# Altium PCB PCB_BRD2.PcbDoc
Units mil, origin at the board's own origin, x right, y up, seen from the top; angles counter-clockwise.
Board outline 3500 x 2505 mil, 2 copper layers (Top Layer, Bottom Layer), stack 61.756 mil thick; 52 components, 33 nets, 161 pads, 0 vias.
Unrouted connection lines stored in the file: 127.
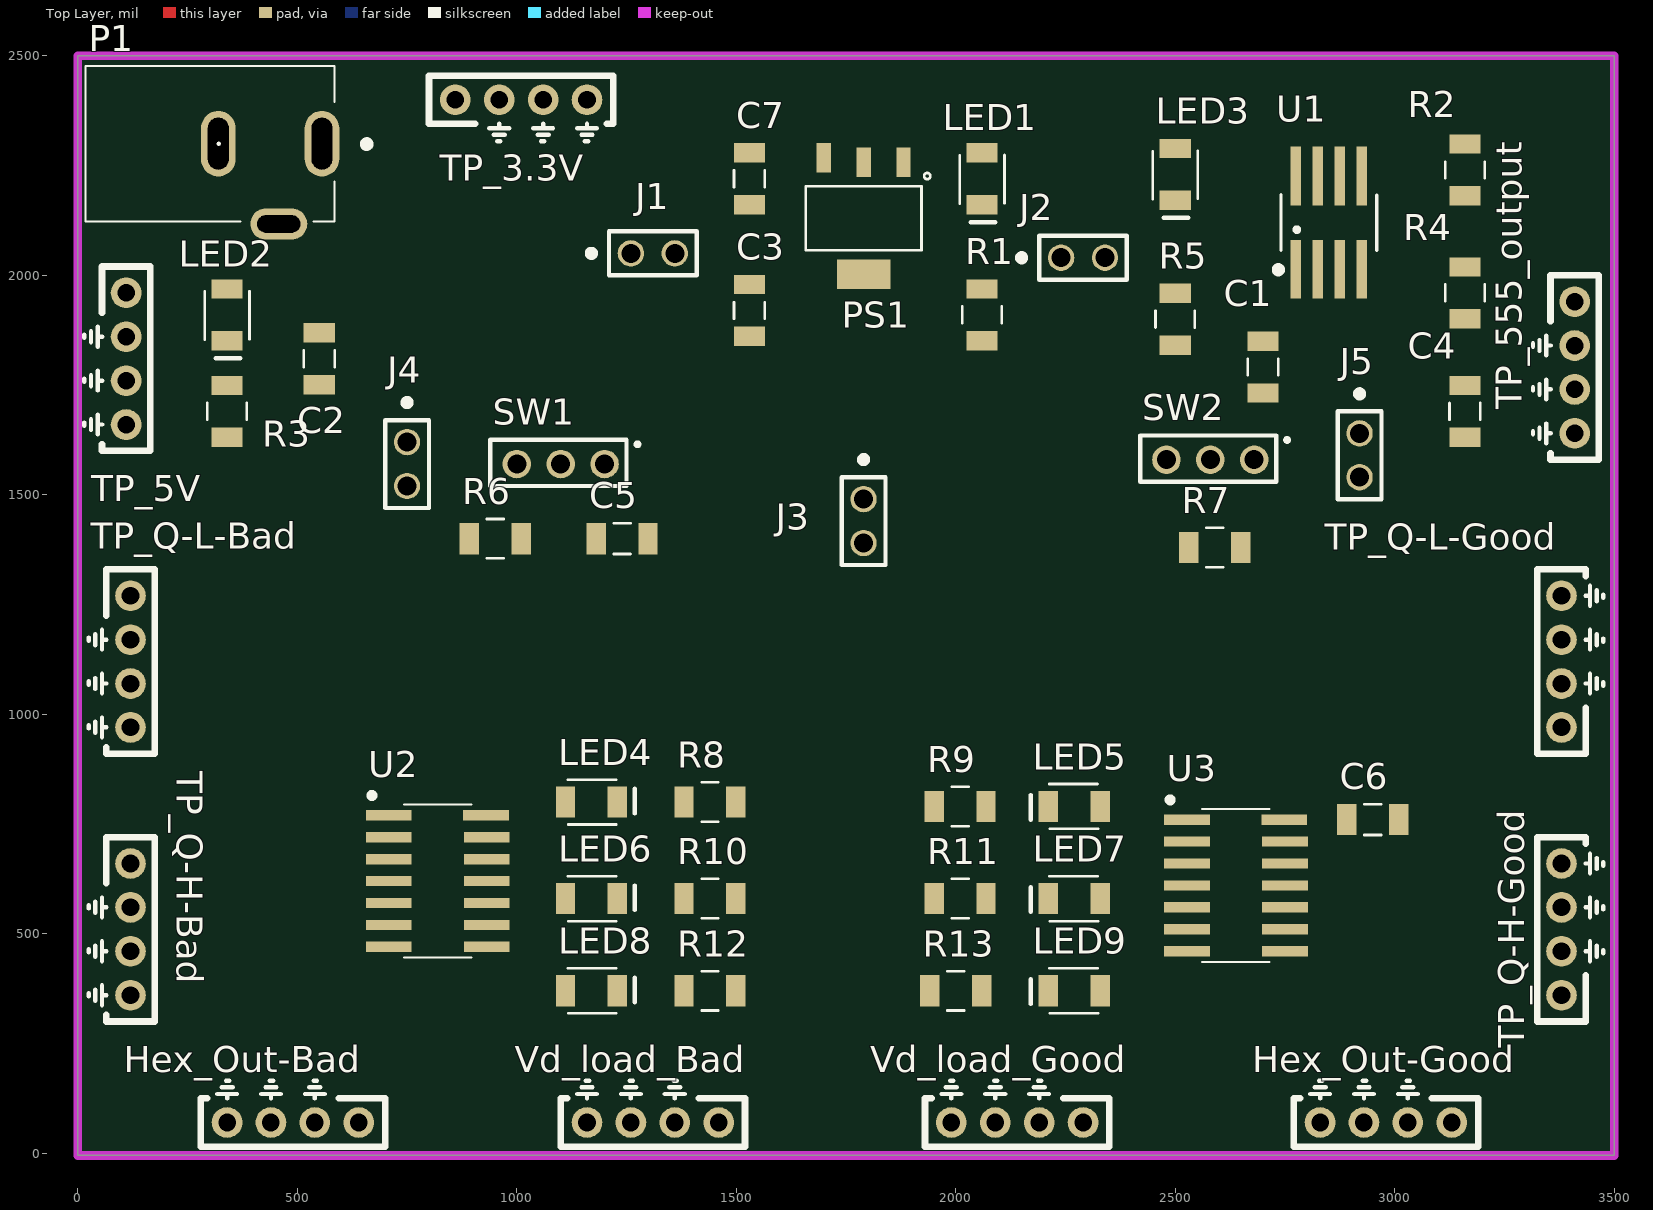
[diagram p0: Top Layer view]
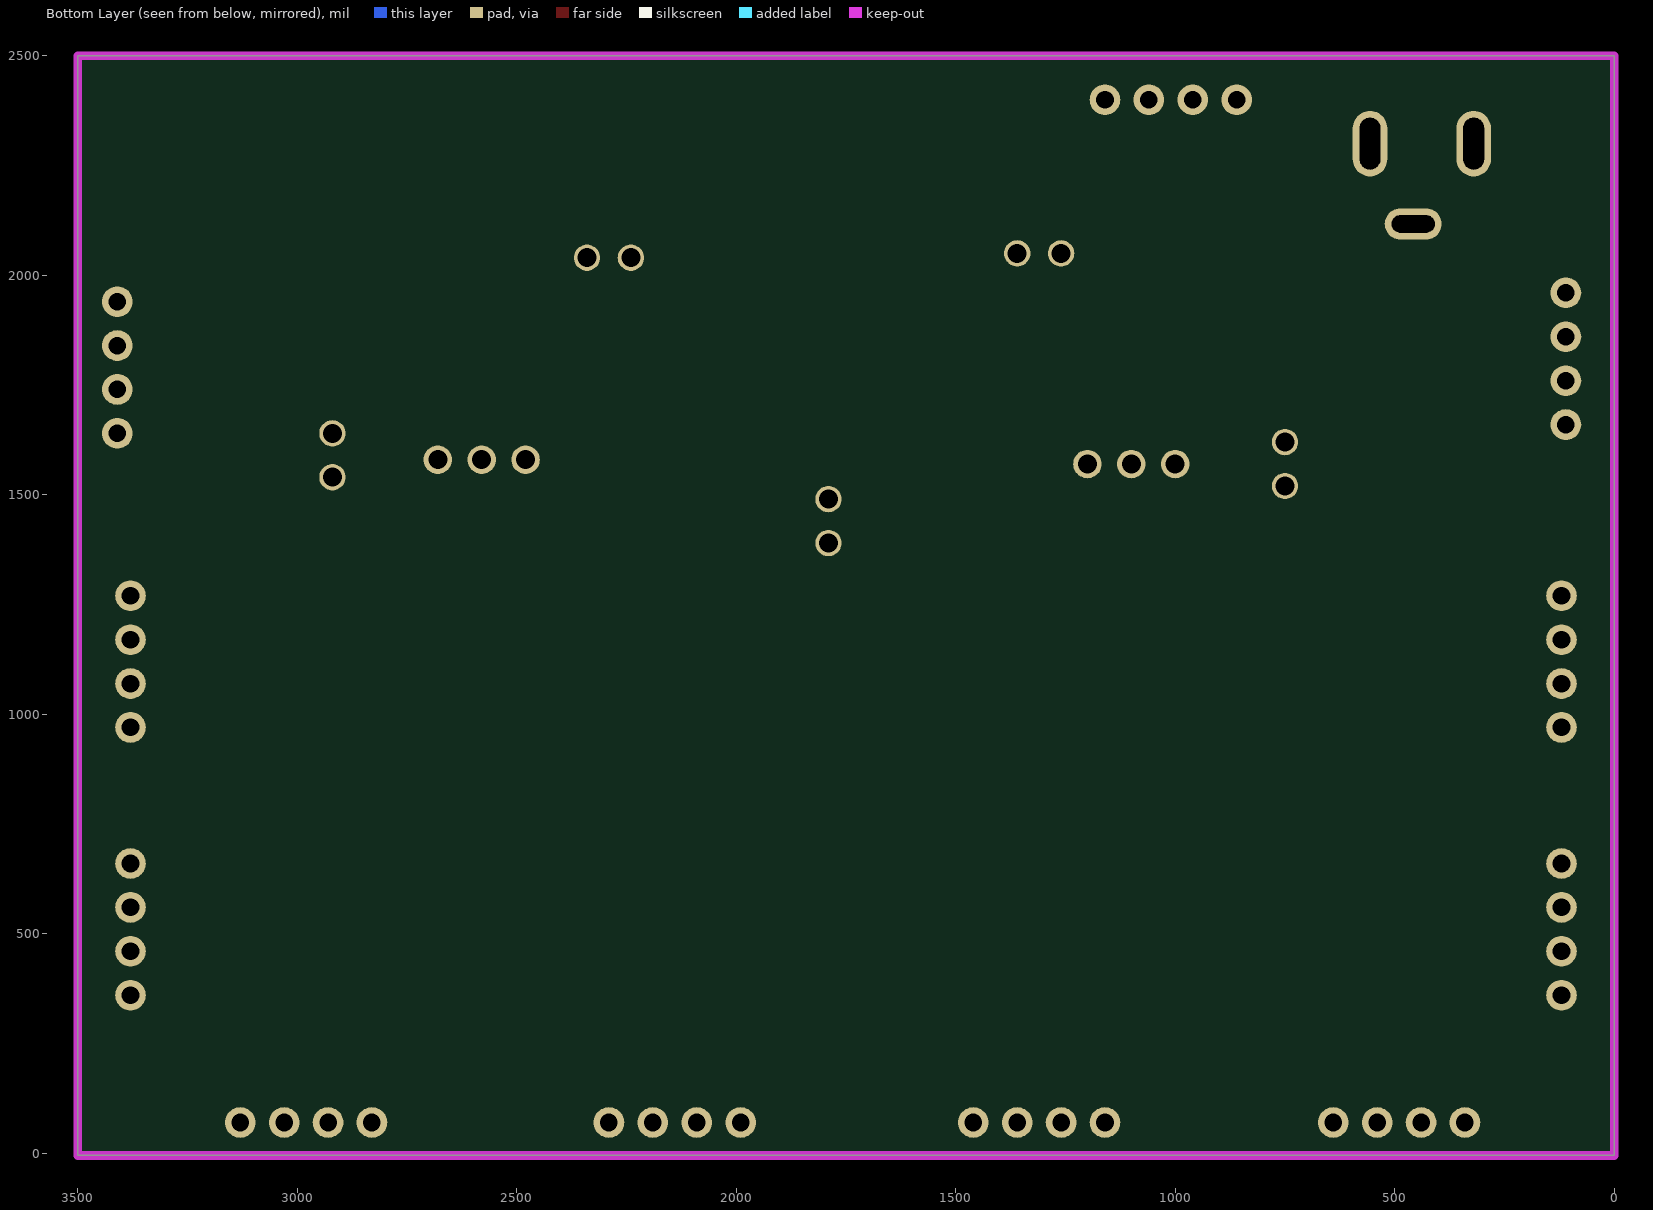
[diagram p1: Bottom Layer view, seen from below]

## Layer stack, top to bottom
Top Solder: solder mask 1, SM-001, Dk 4
Top Layer: signal copper 1.378
Dielectric 1: core 59, Core-043, Dk 4.3
Bottom Layer: signal copper 1.378
Bottom Solder: solder mask 1, SM-001, Dk 4

## Board outline
0,-5 3500,-5 3500,2500 0,2500

## Design rules (kind name [scope] priority, off if disabled: settings)
BoardOutlineClearance BoardOutlineClearance_1 [All] p1: gap=10 ignorepadtopadclearanceinfootprint=FALSE except(0: Arc-SplitContinuation Track-SplitContinuation SMDPad-SplitContinuation THPad-SplitContinuation Via-SplitContinuation Fill-SplitContinuation Poly-SplitContinuation Region-SplitContinuation Text-SplitContinuation)
Clearance Clearance_1 [All] p1: gap=10 ignorepadtopadclearanceinfootprint=FALSE except(0: Arc-Hole Track-Hole SMDPad-Hole THPad-Hole Via-Hole Fill-Hole Poly-Hole Region-Hole Text-Hole Hole-Hole)
Clearance Clearance_1 [OnMid vs OnMid] p2: gap=10 ignorepadtopadclearanceinfootprint=FALSE sourcerule=41 cellrowname=All cellrowtype=0 cellcolname=All cellcoltype=0 innerlayers=TRUE
Clearance Clearance_2 [(ExistsOnLayer('Top Layer') Or ExistsOnLayer('Bottom Layer')) vs (ExistsOnLayer('Top Layer') Or ExistsOnLayer('Bottom Layer'))] p3: gap=10 ignorepadtopadclearanceinfootprint=FALSE sourcerule=41 cellrowname=All cellrowtype=0 cellcolname=All cellcoltype=0 outerlayers=TRUE
Clearance [All] p4: gap=10 ignorepadtopadclearanceinfootprint=FALSE ismatrix=TRUE
PlaneClearance [All] p1: clearance=10
PlaneConnect [All] p1: planeconnectstyle=Direct reliefexpansion=20 reliefentries=4 reliefconductorwidth=10 reliefairgap=10
PolygonConnect PolygonConnectStyle_1 [All] p1: thpad.connectstyle=Relief thpad.reliefconductorwidth=10 thpad.reliefentries=2 thpad.polygonreliefangle="0 Angle" thpad.airgapwidth=10 smdpad.connectstyle=Direct smdpad.reliefconductorwidth=10 smdpad.reliefentries=2 smdpad.polygonreliefangle="0 Angle" smdpad.airgapwidth=10 via.connectstyle=Relief via.reliefconductorwidth=10 via.reliefentries=2 via.polygonreliefangle="0 Angle" via.airgapwidth=10
PolygonConnect [All] p2: connectstyle=Direct reliefconductorwidth=10 reliefentries=4 polygonreliefangle="90 Angle" airgapwidth=10
RoutingVias RoutingViaStyle_1 [All] p1: holewidth=13 width=10 viastyle="Through Hole" minholewidth=13 minwidth=25 maxholewidth=60 maxwidth=80
RoutingVias [All] p2: holewidth=28 width=50 viastyle="Through Hole" minholewidth=28 minwidth=50 maxholewidth=28 maxwidth=50
SolderMaskExpansion [All] p1: expansion=4 istentingtop=FALSE
Width MaxMinWidth_1 [All] p1: maxlimit=100 minlimit=6 preferedwidth=6 bottomlayer_maxwidth=10 minimp=50.000000 maximp=50.000000 favimp=50.000000
Width [All] p2: maxlimit=10 minlimit=10 preferedwidth=10
28 further rules are at their usual default settings.

## Components (designator, comment, footprint, x,y, rotation, side; value= is the part's Value field where it differs from the comment)
C1 "C_22uF_1206" 1206_Passive_Capacitor 2700,1791 r90 top value=22µF
C2 "C_22uF_1206" 1206_Passive_Capacitor 550,1810 r90 top value=22µF
C3 "C_22uF_1206" 1206_Passive_Capacitor 1530,1920 r90 top value=22µF
C4 "C_1uF_1206" 1206_Passive_Capacitor 3160,1690 r90 top value=1µF
C5 "C_22uF_1206" 1206_Passive_Capacitor 1240,1400 r180 top value=22µF
C6 "C_22uF_1206" 1206_Passive_Capacitor 2950,760 r180 top value=22µF
C7 "C_22uF_1206" 1206_Passive_Capacitor 1530,2220 r270 top value=22µF
Hex_Out-Bad "TP_10x_Probe" TP10x_Probe 490,70 r180 top (schematic designator TP_Hex_Out-Bad)
Hex_Out-Good "TP_10x_Probe" TP10x_Probe 2980,70 r180 top (schematic designator TP_Hex_Out-Good)
J1 "JM_2_PIN_MALE" 2_PIN_100MIL 1310,2050 r0 top value="2 PIN"
J2 "JM_2_PIN_MALE" 2_PIN_100MIL 2290,2040 r0 top value="2 PIN"
J3 "JM_2_PIN_MALE" 2_PIN_100MIL 1790,1440 r270 top value="2 PIN"
J4 "JM_2_PIN_MALE" 2_PIN_100MIL 750,1570 r270 top value="2 PIN"
J5 "JM_2_PIN_MALE" 2_PIN_100MIL 2920,1590 r270 top value="2 PIN"
LED1 "LED_RED_1206" LED_1206 2060,2220 r270 top value=Red
LED2 "LED_RED_1206" LED_1206 340,1910 r270 top value=Red
LED3 "LED_RED_1206" LED_1206 2500,2230 r270 top value=Red
LED4 "LED_RED_1206" LED_1206 1170,800 r0 top value=Red
LED5 "LED_RED_1206" LED_1206 2270,790 r180 top value=Red
LED6 "LED_RED_1206" LED_1206 1170,580 r0 top value=Red
LED7 "LED_RED_1206" LED_1206 2270,580 r180 top value=Red
LED8 "LED_RED_1206" LED_1206 1170,370 r0 top value=Red
LED9 "LED_RED_1206" LED_1206 2270,370 r180 top value=Red
P1 "P_Power Jack" Power_Jack 556.22,2300 r180 top value="CONN PWR JACK 2X5.5MM SOLDER"
PS1 "PS_AMS_LDO_3v3" LDO 1790,2130 r180 top value="IC REG LINEAR 3.3V 800MA SOT223"
R1 "R_1K_1206" 1206_Passive_Resitor 2060,1910 r90 top value=1k
R2 "R_1K_1206" 1206_Passive_Resitor 3160,2240 r90 top value=1k
R3 "R_1K_1206" 1206_Passive_Resitor 340,1690 r90 top value=1k
R4 "R_1K_1206" 1206_Passive_Resitor 3160,1960 r90 top value=1k
R5 "R_1K_1206" 1206_Passive_Resitor 2500,1900 r90 top value=1k
R6 "R_10KOhm_1206" 1206_Passive_Resitor 951,1400 r0 top value=10k
R7 "R_10KOhm_1206" 1206_Passive_Resitor 2590,1380 r180 top value=10k
R8 "R_47Ohm_1206" 1206_Passive_Resitor 1440,800 r0 top value=47
R9 "R_47Ohm_1206" 1206_Passive_Resitor 2010,790 r180 top value=47
R10 "R_47Ohm_1206" 1206_Passive_Resitor 1440,580 r0 top value=47
R11 "R_47Ohm_1206" 1206_Passive_Resitor 2010,580 r180 top value=47
R12 "R_47Ohm_1206" 1206_Passive_Resitor 1440,370 r0 top value=47
R13 "R_47Ohm_1206" 1206_Passive_Resitor 2000,370 r180 top value=47
SW1 "SW_3Pin_100mil_Switch" 3_PIN_100mil 1200,1570 r180 top value="CONN HEADER VERT 3POS 2.54MM"
SW2 "SW_3Pin_100mil_Switch" 3_PIN_100mil 2680,1580 r180 top value="CONN HEADER VERT 3POS 2.54MM"
TP_3.3V "TP_10x_Probe" TP10x_Probe 1010,2400 r0 top
TP_5V "TP_10x_Probe" TP10x_Probe 110,1810 r270 top
TP_555_output "TP_10x_Probe" TP10x_Probe 3410,1790 r270 top
TP_Q-H-Bad "TP_10x_Probe" TP10x_Probe 120,510 r270 top
TP_Q-H-Good "TP_10x_Probe" TP10x_Probe 3380,510 r90 top
TP_Q-L-Bad "TP_10x_Probe" TP10x_Probe 120,1120 r270 top
TP_Q-L-Good "TP_10x_Probe" TP10x_Probe 3380,1120 r90 top
U1 "U_555_Fast" TS555IDTTR 2850,2120 r90 top
U2 "U_74AHC14" HEX_74AC14 820,620 r0 top
U3 "U_74AHC14" HEX_74AC14 2638.35,610 r0 top
Vd_load_Bad "TP_10x_Probe" TP10x_Probe 1310,70 r180 top (schematic designator TP_Vdrop_load_Bad)
Vd_load_Good "TP_10x_Probe" TP10x_Probe 2140,70 r180 top (schematic designator TP_Vdrop_load_Good)

## Footprints (in the part's own frame and the unit in brackets; to place one, negate y for a bottom-side part, rotate by r counter-clockwise, add the part's x,y. Pads: shape width x height; smd on the part's side, far side on the other; paste and mask are expansions set on the pad)
2_PIN_100MIL [mil]
  round 60 hole 43.31: 1(-50,0) 2(50,0)
  silkscreen extent -145,-50 100,50, body extent -100,-50 100,50, height 336
3_PIN_100mil [mm]
  round 1.65 hole 1.1: 1(0,0) 2(2.54,0) 3(5.08,0)
  silkscreen extent -2,-1.4 6.6,1.27, body extent -1.14,-1.27 6.48,1.27, height 8.38
1206_Passive_Capacitor [mil]
  rect 44x71 smd: 1(-59,0) 2(59,0)
  silkscreen extent -19,-35 19,35, body extent -63,-31 63,32, height 50
1206_Passive_Resitor [mil]
  rect 44x71 smd: 1(-59,0) 2(59,0)
  silkscreen extent -19,-45 19,45, body extent -61,-31 61,31, height 26
HEX_74AC14 [mm]
  rect 2.65x0.6 smd: 1(-2.836,3.81) 2(-2.836,2.54) 3(-2.836,1.27) 4(-2.836,0) 5(-2.836,-1.27) 6(-2.836,-2.54) 7(-2.836,-3.81) 8(2.836,-3.81) 9(2.836,-2.54) 10(2.836,-1.27) 11(2.836,0) 12(2.836,1.27) 13(2.836,2.54) 14(2.794,3.81)
  silkscreen extent -3.94,-4.43 1.95,5.08, body extent -3.18,-4.35 2.82,4.3, height 1.75
LDO [mm]
  rect 0.838x1.7 smd: 1(-2.311,-3.25) 2(0,-3.25) 3(2.311,-3.5)
  rect 3.099x1.7 smd: 4(0,3.25)
  silkscreen extent -3.86,-2.62 3.35,1.85, body extent -3.25,-3.65 3.25,3.35, height 1.85
LED_1206 [mil]
  rect 44x71 smd: 1(-59,0) 2(59,0)
  silkscreen extent -54,-51 99,51, body extent -63,-31 63,31, height 28
Power_Jack [mm]
  oval 2x3.8 hole 1.2 slot 3 at 90 deg: 1(0,0) 2(6,0)
  oval 3.3x1.8 hole 1 slot 2.5 at 0 deg: 3(2.5,4.65)
  silkscreen extent -2.79,-4.5 13.68,4.5, body extent -0.76,-4.45 13.64,4.95, height 11.49
TP10x_Probe [mil] "Small Probs footprint"
  round 70 hole 40: 1(-150,0) 2(-50,0) 2(50,0) 2(150,0)
  silkscreen extent -210,-95 210,55
TS555IDTTR [mm] "IC OSC Single Timer 2.7MHz 8SOIC"
  rect 3.4x0.6 smd: 1(-2.7,1.905) 2(-2.7,0.635) 3(-2.7,-0.635) 4(-2.7,-1.905) 5(2.7,-1.905) 6(2.7,-0.635) 7(2.7,0.635) 8(2.7,1.905)
  silkscreen extent -2.85,-2.77 1.6,3.05, body extent -3.03,-2.48 2.96,2.43, height 1.75

## Part data
C1 C2 C3 C5 C6 C7: library part CMP-001-00089-1, "22uF ±10% 25V X5R 1206 Multilayer Ceramic Capacitors MLCC - SMD/SMT RoHS", LCSC Part#=C12891, MFR Part #=CL31A226KAHNNNE, Component Type=Standard, Datasheet=https://datasheet.lcsc.com/lcsc/1811031514_Samsung-Electro-Mechanics-CL31A226KAHNNNE_C12891.pdf, Design Item ID=C_22uF_1206, Pins=2, Source=ECEN5730Lib_2023_05_DS.SchLib, Type=basic
C4: library part CMP-001-00086-1, "MULTILAYER CERAMIC CAPACITORS MLCC - SMD/SMT 1UF 50V 1206 ROHS", LCSC Part#=C1848, MFR Part #=CL31B105KBHNNNE, Component Type=Standard, Design Item ID=C_1uF_1206, Digikey Link=https://www.digikey.com/product-detail/en/C1206C105M4RACTU/399-8150-1-ND/3471873/?itemSeq=304982366, Pins=2, Source=ECEN5730Lib_2023_05_DS.SchLib, Type=Basic
Hex_Out-Bad Hex_Out-Good TP_3.3V TP_5V TP_555_output TP_Q-H-Bad TP_Q-H-Good TP_Q-L-Bad TP_Q-L-Good Vd_load_Bad Vd_load_Good: library part CMP-016-000001-1, "Test Point 300 mil centers", Component Type=Standard, Design Item ID=TP_10x_Probe, Pin Count=2, Source=ECEN5730Lib_2023_05_DS.SchLib
J1 J2 J3 J4 J5: library part CMP-002-00089-1, "2.54mm Straight 2 1 Header,Breakaway Through Hole,P=2.54mm Pin Header & Female Header ROHS", LCSC Part#=C124375, MFR Part #=B-2100S02P-A110, Component Type=Standard, Datasheet=https://datasheet.lcsc.com/lcsc/1811151421_Ckmtw-Shenzhen-Cankemeng-B-2100S02P-A110_C124375.pdf, Design Item ID=JM_2_PIN_MALE, Pins=2, Source=ECEN5730Lib_2023_05_DS.SchLib, Type=Extended
LED1 LED2 LED3: library part CMP-007-00045-1, "Red 621~631nm 1206 Light Emitting Diodes (LED) RoHS", LCSC Part#=C93133, MFR Part #=15-21/R6C-FQ1R1B/2T, Component Type=Standard, Datasheet=https://datasheet.lcsc.com/szlcsc/1811151241_Everlight-Elec-15-21-R6C-FQ1R1B-2T_C93133.pdf, Design Item ID=LED_RED_1206, Pins=2, Source=ECEN5730Lib_2023_05_DS.SchLib, Type=Extended
LED4 LED5 LED6 LED7 LED8 LED9: library part CMP-007-00055-1, "Red 621~631nm 1206 Light Emitting Diodes (LED) RoHS", LCSC Part#=C93133, MFR Part #=15-21/R6C-FQ1R1B/2T, Component Type=Standard, Datasheet=https://datasheet.lcsc.com/szlcsc/1811151241_Everlight-Elec-15-21-R6C-FQ1R1B-2T_C93133.pdf, Design Item ID=LED_RED_1206, Pins=2, Source=ECEN5730Lib_2023_05_DS.SchLib, Type=Extended
P1: library part CMP-002-00097-1, "Power Barrel Connector Jack 2.10mm ID (0.083\"), 5.50mm OD (0.217\") Through Hole, Right Angle", LCSC Part#=C136744, MFR Part #=PJ-102A, Component Type=Standard, Design Item ID="P_Power Jack", Digikey Link=https://www.digikey.com/product-detail/en/PJ-102A/CP-102A-ND/275425/?itemSeq=304982367, Pins=3, Source=ECEN5730Lib_2023_05_DS.SchLib, Type=Extended
PS1: library part CMP-017-000002-1, "LOW DROPOUT REGULATORS(LDO) POSITIVE FIXED 1.3V @ 800MA 15V 3.3V 1A SOT-223 ROHS", LCSC Part#=C6186, MFR Part #=AMS1117-3.3, Component Type=Standard, Design Item ID=PS_AMS_LDO_3v3, Pin Count=4, Source=ECEN5730Lib_2023_05_DS.SchLib, Type=Basic
R1 R3 R5: library part CMP-009-00194-1, "CHIP RESISTOR - SURFACE MOUNT 1KOHMS ±1% 1/4W 1206 ROHS", LCSC Part#=C4410, MFR Part #=RNCP1206FTD1K00CT, Component Type=Standard, Design Item ID=R_1K_1206, Digikey Link=https://www.digikey.com/product-detail/en/RNCP1206FTD1K00/RNCP1206FTD1K00CT-ND/2240675/?itemSeq=304982373, Pins=2, Source=ECEN5730Lib_2023_05_DS.SchLib, Type=Basic
R2 R4: library part CMP-009-00231-1, "CHIP RESISTOR - SURFACE MOUNT 1KOHMS ±1% 1/4W 1206 ROHS", LCSC Part#=C4410, MFR Part #=RNCP1206FTD1K00CT, Component Type=Standard, Design Item ID=R_1K_1206, Digikey Link=https://www.digikey.com/product-detail/en/RNCP1206FTD1K00/RNCP1206FTD1K00CT-ND/2240675/?itemSeq=304982373, Pins=2, Source=ECEN5730Lib_2023_05_DS.SchLib, Type=Basic
R6 R7: library part CMP-009-00223-1, "10 kOhms ±5% 0.25W, 1/4W Chip Resistor 1206 (3216 Metric) Automotive AEC-Q200 Thick Film", LCSC Part#=C17902, MFR Part #=RMCF1206FT10K0, Component Type=Standard, Design Item ID=R_10KOhm_1206, Digikey Link=https://www.digikey.com/en/products/detail/stackpole-electronics-inc/RMCF1206FT10K0/1759669, Pins=2, Source=ECEN5730Lib_2023_05_DS.SchLib, Type=Basic
R8 R9 R10 R11 R12 R13: library part CMP-009-00209-1, "47O ±5% 0.25W ±200ppm/? 1206 Chip Resistor - Surface Mount RoHS", LCSC Part#=C25384, MFR Part #=1206W4J0470T5E, Component Type=Standard, Datasheet=https://datasheet.lcsc.com/lcsc/1811101020_UNI-ROYAL-Uniroyal-Elec-1206W4J0470T5E_C25384.pdf, Design Item ID=R_47Ohm_1206, Pins=2, Source=ECEN5730Lib_2023_05_DS.SchLib, Type=Extended
SW1 SW2: library part CMP-002-00126-1, "Connector Header Through Hole 3 position 0.100\" (2.54mm)", LCSC Part#=C49257, MFR Part #=PREC003SAAN-RC, Component Type=Standard, Design Item ID=SW_3Pin_100mil_Switch, Digikey Link=https://www.digikey.com/product-detail/en/PREC003SAAN-RC/S1012EC-03-ND/2774851/?itemSeq=304982371, Pins=3, Source=ECEN5730Lib_2023_05_DS.SchLib, Type=Extended
U1: library part CMP-031-00019-1, "555 Type, Timer/Oscillator _Single_ IC 3MHz 8-SO", Case/Package=SOIC-8, LCSC Part#=C90760, MFR Part #=LMC555CMX/NOPB, Component Type=Standard, Design Item ID=U_555_Fast, Digikey Link=https://www.digikey.com/product-detail/en/texas-instruments/LMC555CMX-NOPB/LMC555CMX-NOPBCT-ND/1010550, Pins=8, Source=ECEN5730Lib_2023_05_DS.SchLib, Type=Extended
U2 U3: library part CMP-031-00021-1, "Inverter IC 6 Channel Schmitt Trigger 14-SOIC", LCSC Part#=C6942, MFR Part #=SN74AHC14DR, Component Type=Standard, Datasheet=https://datasheet.lcsc.com/szlcsc/ON-Semicon-ON-74AC14SCX_C5482.pdf, Design Item ID=U_74AHC14, Pins=14, Source=ECEN5730Lib_2023_05_DS.SchLib, Type=Extended

## Nets (pads, with @x,y where several pads share a name; then routed paths per layer and width w, separated by ;. In a path a pad name is that pad's centre, name@x,y a point inside that pad or via, vN(x,y) a via of type N, cw(c..) or ccw(c..) an arc to the next point about the centre after c; other vN are vias at no path point)
3.3V: C1.2 C2.1 C3.2 C4.1 C5.1 C6.1 C7.2 Hex_Out-Bad.2 Hex_Out-Good.2 J3.1 LED1.1 P1.2 P1.3 PS1.1 PS1.2 PS1.4 R1.1 R3.1 R5.1 R8.2 R9.2 R10.2 R11.2 R12.2 R13.2 SW1.1 SW2.1 TP_3.3V.1 TP_3.3V.2 TP_5V.2 TP_555_output.2 TP_Q-H-Bad.2 TP_Q-H-Good.2 TP_Q-L-Bad.2 TP_Q-L-Good.2 U1.1 U2.3 U2.7 U3.3 U3.7 Vd_load_Bad.2 Vd_load_Good.2
5V: C2.2 J1.1 J2.1 LED2.1 P1.1 SW1.3 SW2.3 TP_5V.1
555_output: J4.1 J5.1 LED3.1 TP_555_output.1 U1.3
NetC1_1: C1.1 J2.2 R2.2 U1.4 U1.8
NetC3_1: C3.1 J3.2
NetC4_2: C4.2 R4.1 U1.2 U1.6
NetC5_2: C5.2 R6.2 SW1.2 U2.1 U2.14
NetC6_2: C6.2 R7.2 SW2.2 U3.1 U3.14
NetC7_1: C7.1 J1.2 PS1.3
NetJ4_2: J4.2 R6.1 U2.5 U2.9 U2.11 U2.13
NetJ5_2: J5.2 R7.1 U3.5 U3.9 U3.11 U3.13
NetLED1_2: LED1.2 R1.2
NetLED2_2: LED2.2 R3.2
NetLED3_2: LED3.2 R5.2
NetLED4_1: LED4.1 U2.12 Vd_load_Bad.1
NetLED4_2: LED4.2 R8.1
NetLED5_1: LED5.1 U3.12 Vd_load_Good.1
NetLED5_2: LED5.2 R9.1
NetLED6_1: LED6.1 U2.10
NetLED6_2: LED6.2 R10.1
NetLED7_1: LED7.1 U3.10
NetLED7_2: LED7.2 R11.1
NetLED8_1: LED8.1 U2.8
NetLED8_2: LED8.2 R12.1
NetLED9_1: LED9.1 U3.8
NetLED9_2: LED9.2 R13.1
NetR2_1: R2.1 R4.2 U1.7
NetTP_Hex_Out-Bad_1: Hex_Out-Bad.1 U2.6
NetTP_Hex_Out-Good_1: Hex_Out-Good.1 U3.6
NetTP_Q-H-Bad_1: TP_Q-H-Bad.1 U2.4
NetTP_Q-H-Good_1: TP_Q-H-Good.1 U3.4
NetTP_Q-L-Bad_1: TP_Q-L-Bad.1 U2.2
NetTP_Q-L-Good_1: TP_Q-L-Good.1 U3.2
pads on no net: U1.5

## Keep-outs
Keep-Out Layer:
  the board outline again, w20